# EAGLE board servoOnly (EAGLE 5.11)
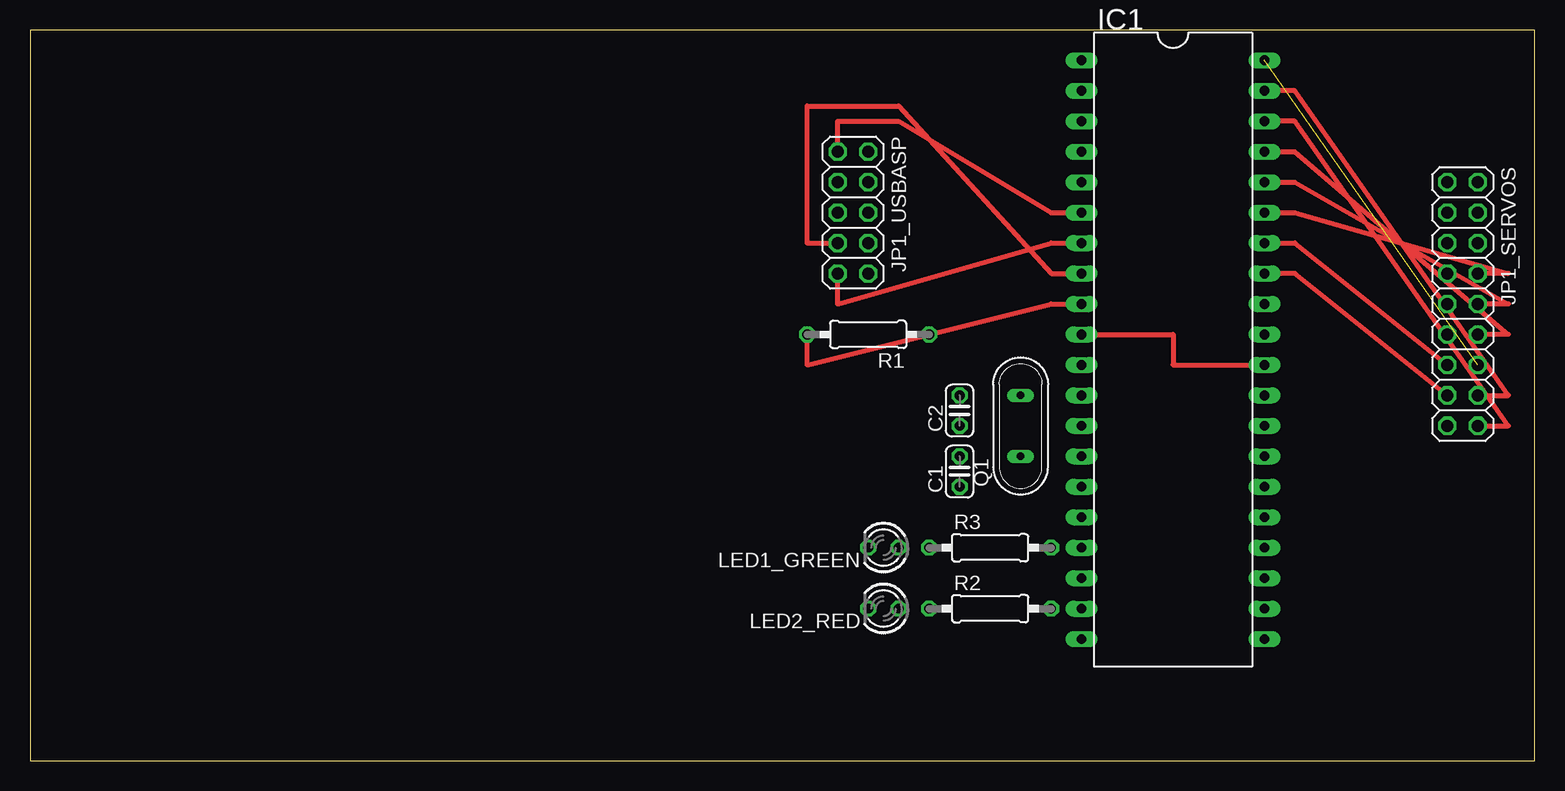
[diagram p0: board, top side]
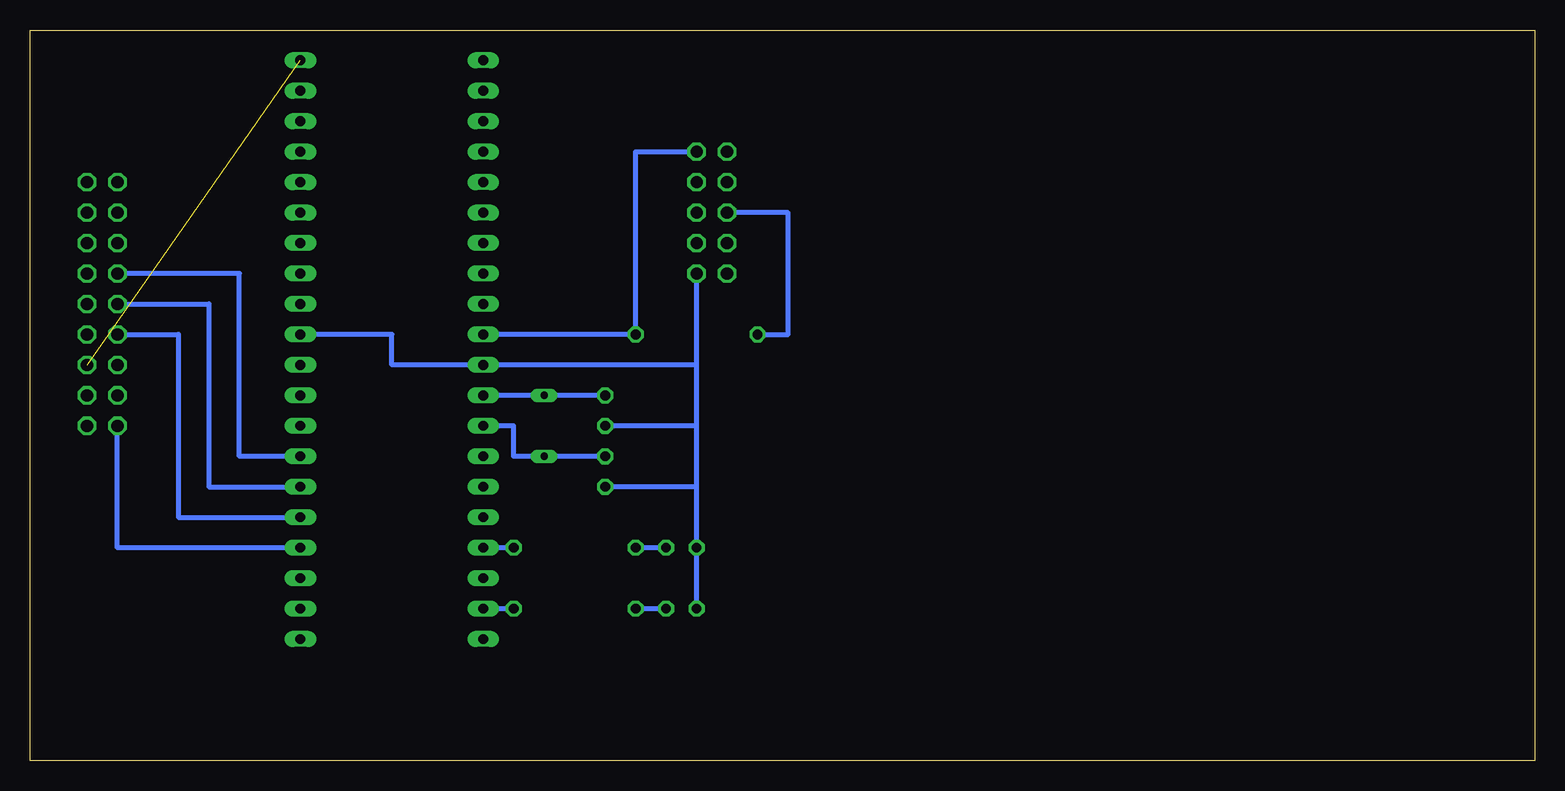
[diagram p1: board, bottom side, seen from below]

Size 125.4 x 60.95 mm. Coordinates in mm from the lower left corner, seen from the top.
Outline: 0,0 125.4,0 125.4,60.95 0,60.95 0,0
Copper layers (1*16): Top 0.035mm / dielectric 1.5mm / Bottom 0.035mm
Design rules "default": minimum track width 10mil, minimum drill 24mil, track to track 8mil, track to pad 8mil, pad to pad 8mil, via to via 8mil, smd to smd 8mil, copper to edge 40mil, drill to drill 8mil, minimum pad ring 10mil, minimum via ring 8mil, stop-mask expansion 4mil, vias tented up to drill 0mil, thermal gap 10mil

## Footprints (pad centres in the part's own frame; a part is rotated, then mirrored left to right if it is on the bottom)
C025-024X044 = drill 0.813 octagon: 1 -1.27,0; 2 1.27,0
DIL40 = drill 0.813 long: 1 -24.13,-7.62; 2 -21.59,-7.62; 3 -19.05,-7.62; 4 -16.51,-7.62; 5 -13.97,-7.62; 6 -11.43,-7.62; 7 -8.89,-7.62; 8 -6.35,-7.62; 9 -3.81,-7.62; 10 -1.27,-7.62; 11 1.27,-7.62; 12 3.81,-7.62; 13 6.35,-7.62; 14 8.89,-7.62; 15 11.43,-7.62; 16 13.97,-7.62; 17 16.51,-7.62; 18 19.05,-7.62; 19 21.59,-7.62; 20 24.13,-7.62; 21 24.13,7.62; 22 21.59,7.62; 23 19.05,7.62; 24 16.51,7.62; 25 13.97,7.62; 26 11.43,7.62; 27 8.89,7.62; 28 6.35,7.62; 29 3.81,7.62; 30 1.27,7.62; 31 -1.27,7.62; 32 -3.81,7.62; 33 -6.35,7.62; 34 -8.89,7.62; 35 -11.43,7.62; 36 -13.97,7.62; 37 -16.51,7.62; 38 -19.05,7.62; 39 -21.59,7.62; 40 -24.13,7.62
2X09 = drill 1.016 octagon: 1 -10.16,-1.27; 2 -10.16,1.27; 3 -7.62,-1.27; 4 -7.62,1.27; 5 -5.08,-1.27; 6 -5.08,1.27; 7 -2.54,-1.27; 8 -2.54,1.27; 9 0,-1.27; 10 0,1.27; 11 2.54,-1.27; 12 2.54,1.27; 13 5.08,-1.27; 14 5.08,1.27; 15 7.62,-1.27; 16 7.62,1.27; 17 10.16,-1.27; 18 10.16,1.27
2X05 = drill 1.016 octagon: 1 -5.08,-1.27; 2 -5.08,1.27; 3 -2.54,-1.27; 4 -2.54,1.27; 5 0,-1.27; 6 0,1.27; 7 2.54,-1.27; 8 2.54,1.27; 9 5.08,-1.27; 10 5.08,1.27
LED3MM = drill 0.813 octagon: A -1.27,0; K 1.27,0
QS = drill 0.61 long: 1 -2.54,0; 2 2.54,0
0207/10 = drill 0.813 octagon: 1 -5.08,0; 2 5.08,0

## Placement (x,y rotation side)
C1  [C025-024X044]  77.47,24.13 90 top
C2  [C025-024X044]  77.47,29.21 90 top
IC1  MEGA32-P  [DIL40]  95.25,34.29 270 top
JP1_SERVOS  [2X09]  119.38,38.1 270 top
JP1_USBASP  [2X05]  68.58,45.72 270 top
LED1_GREEN  [LED3MM]  71.12,17.78 180 top
LED2_RED  [LED3MM]  71.12,12.7 180 top
Q1  [QS]  82.55,27.94 90 top
R1  [0207/10]  69.85,35.56 180 top
R2  [0207/10]  80.01,12.7 0 top
R3  [0207/10]  80.01,17.78 0 top

## Library data of the parts
C1 C2 R1-R3 = resistor
IC1 = atmel; MPN: ATMEGA32-16PU; OC_FARNELL: 1661729; OC_NEWARK: 51P1794
JP1_SERVOS JP1_USBASP = pinhead
LED1_GREEN LED2_RED = led
Q1 = special

## Nets
GND: C1.1 C2.1 IC1.11 IC1.31 JP1_USBASP.10 LED1_GREEN.K LED2_RED.K
N$1: IC1.17 R3.2
N$2: LED1_GREEN.A R3.1
N$3: LED2_RED.A R2.1
N$4: IC1.19 R2.2
N$5: IC1.9 JP1_USBASP.5 R1.2
N$6: C2.2 IC1.12 Q1.2
N$7: C1.2 IC1.13 Q1.1
N$8: IC1.6 JP1_USBASP.1
N$9: IC1.8 JP1_USBASP.7
N$10: IC1.7 JP1_USBASP.9
N$12: IC1.40 JP1_SERVOS.14
N$13: IC1.39 JP1_SERVOS.16
N$14: IC1.38 JP1_SERVOS.18
N$15: IC1.37 JP1_SERVOS.12
N$16: IC1.36 JP1_SERVOS.10
N$17: IC1.35 JP1_SERVOS.8
N$18: IC1.34 JP1_SERVOS.13
N$19: IC1.33 JP1_SERVOS.15
N$20: IC1.24 JP1_SERVOS.17
N$21: IC1.25 JP1_SERVOS.11
N$22: IC1.26 JP1_SERVOS.9
N$23: IC1.27 JP1_SERVOS.7
VCC: IC1.10 IC1.30 JP1_USBASP.2 R1.1

## Tracks (layer width: path | path; a pad name or v marks a point on that pad's centre or on a via)
GND
  Bottom 0.406: IC1.31 95.25,35.56 95.25,33.02 IC1.11 69.85,33.02 | LED2_RED.K LED1_GREEN.K 69.85,22.86 | 69.85,22.86 69.85,27.94 | 69.85,27.94 69.85,33.02 | 69.85,22.86 C1.1 | 69.85,27.94 C2.1 | 69.85,33.02 JP1_USBASP.10
N$1
  Bottom 0.406: R3.2 IC1.17
N$2
  Bottom 0.406: LED1_GREEN.A R3.1
N$3
  Bottom 0.406: LED2_RED.A R2.1
N$4
  Bottom 0.406: R2.2 IC1.19
N$5
  Top 0.406: R1.2 64.77,33.02 85.09,38.1 IC1.9
  Bottom 0.406: R1.2 62.23,35.56 62.23,45.72 JP1_USBASP.5
N$6
  Bottom 0.406: IC1.12 Q1.2 C2.2
N$7
  Bottom 0.406: C1.2 Q1.1 85.09,25.4 85.09,27.94 IC1.13
N$8
  Top 0.406: JP1_USBASP.1 67.31,53.34 72.39,53.34 85.09,45.72 IC1.6
N$9
  Top 0.406: JP1_USBASP.7 64.77,43.18 64.77,54.61 72.39,54.61 85.09,40.64 IC1.8
N$10
  Top 0.406: JP1_USBASP.9 67.31,38.1 85.09,43.18 IC1.7
N$12  (1 unrouted)
N$13
  Top 0.406: JP1_SERVOS.16 123.19,30.48 105.41,55.88 IC1.39
N$14
  Top 0.406: JP1_SERVOS.18 123.19,27.94 105.41,53.34 IC1.38
N$15
  Top 0.406: IC1.37 105.41,50.8 123.19,35.56 JP1_SERVOS.12
N$16
  Top 0.406: IC1.36 105.41,48.26 123.19,38.1 JP1_SERVOS.10
N$17
  Top 0.406: IC1.35 105.41,45.72 123.19,40.64 JP1_SERVOS.8
N$18
  Top 0.406: IC1.34 105.41,43.18 JP1_SERVOS.13
N$19
  Top 0.406: JP1_SERVOS.15 105.41,40.64 IC1.33
N$20
  Bottom 0.406: IC1.24 118.11,17.78 JP1_SERVOS.17
N$21
  Bottom 0.406: JP1_SERVOS.11 113.03,35.56 113.03,20.32 IC1.25
N$22
  Bottom 0.406: JP1_SERVOS.9 110.49,38.1 110.49,22.86 IC1.26
N$23
  Bottom 0.406: IC1.27 107.95,25.4 107.95,40.64 JP1_SERVOS.7
VCC
  Top 0.406: IC1.10 95.25,35.56 95.25,33.02 IC1.30
  Bottom 0.406: IC1.10 R1.1 74.93,50.8 JP1_USBASP.2